# Altium PCB LCLFilter_Compact.PcbDoc
Units mm, origin at the board's own origin, x right, y up, seen from the top; angles counter-clockwise.
Board outline 126 x 101 mm, 2 copper layers (Top Layer, Bottom Layer); 16 components, 12 nets, 31 pads, 0 vias.
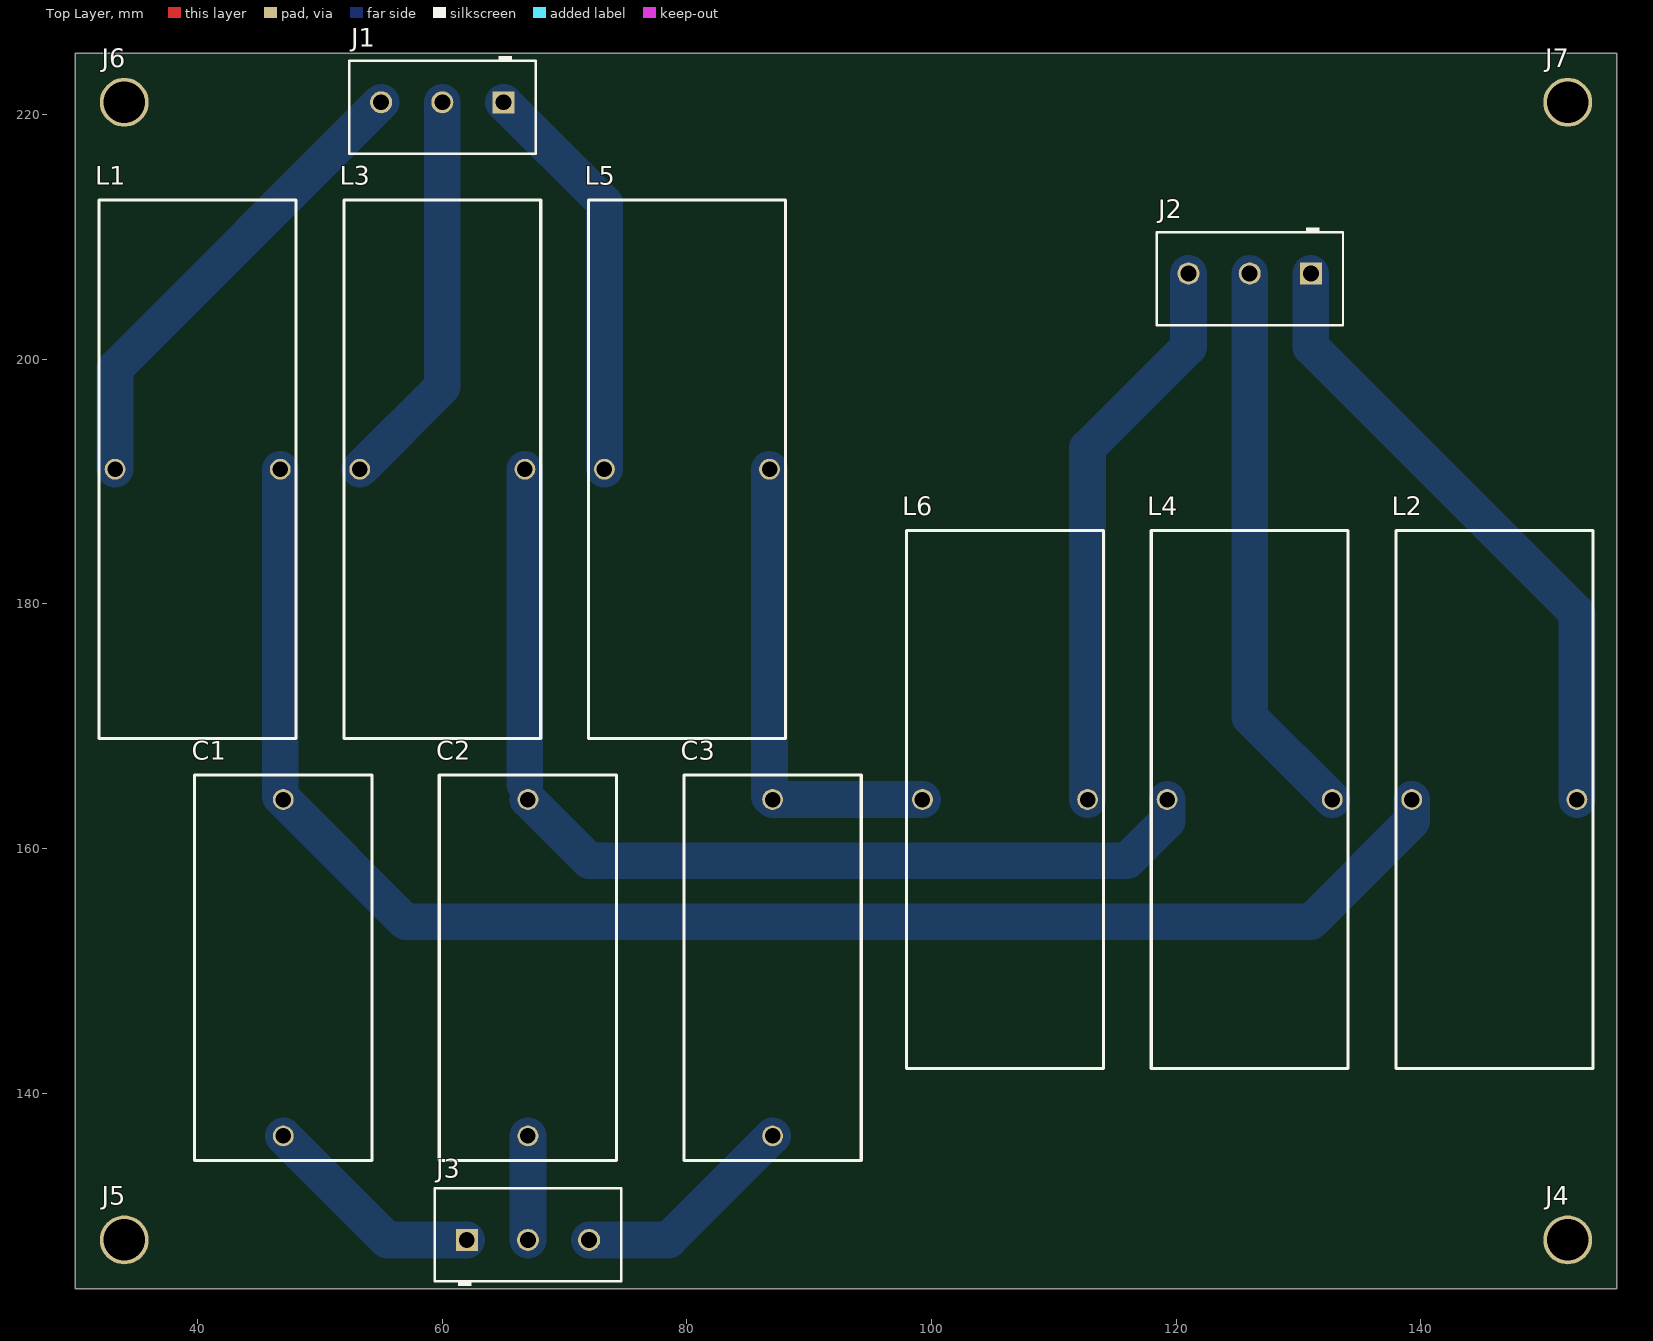
[diagram p0: Top Layer view]
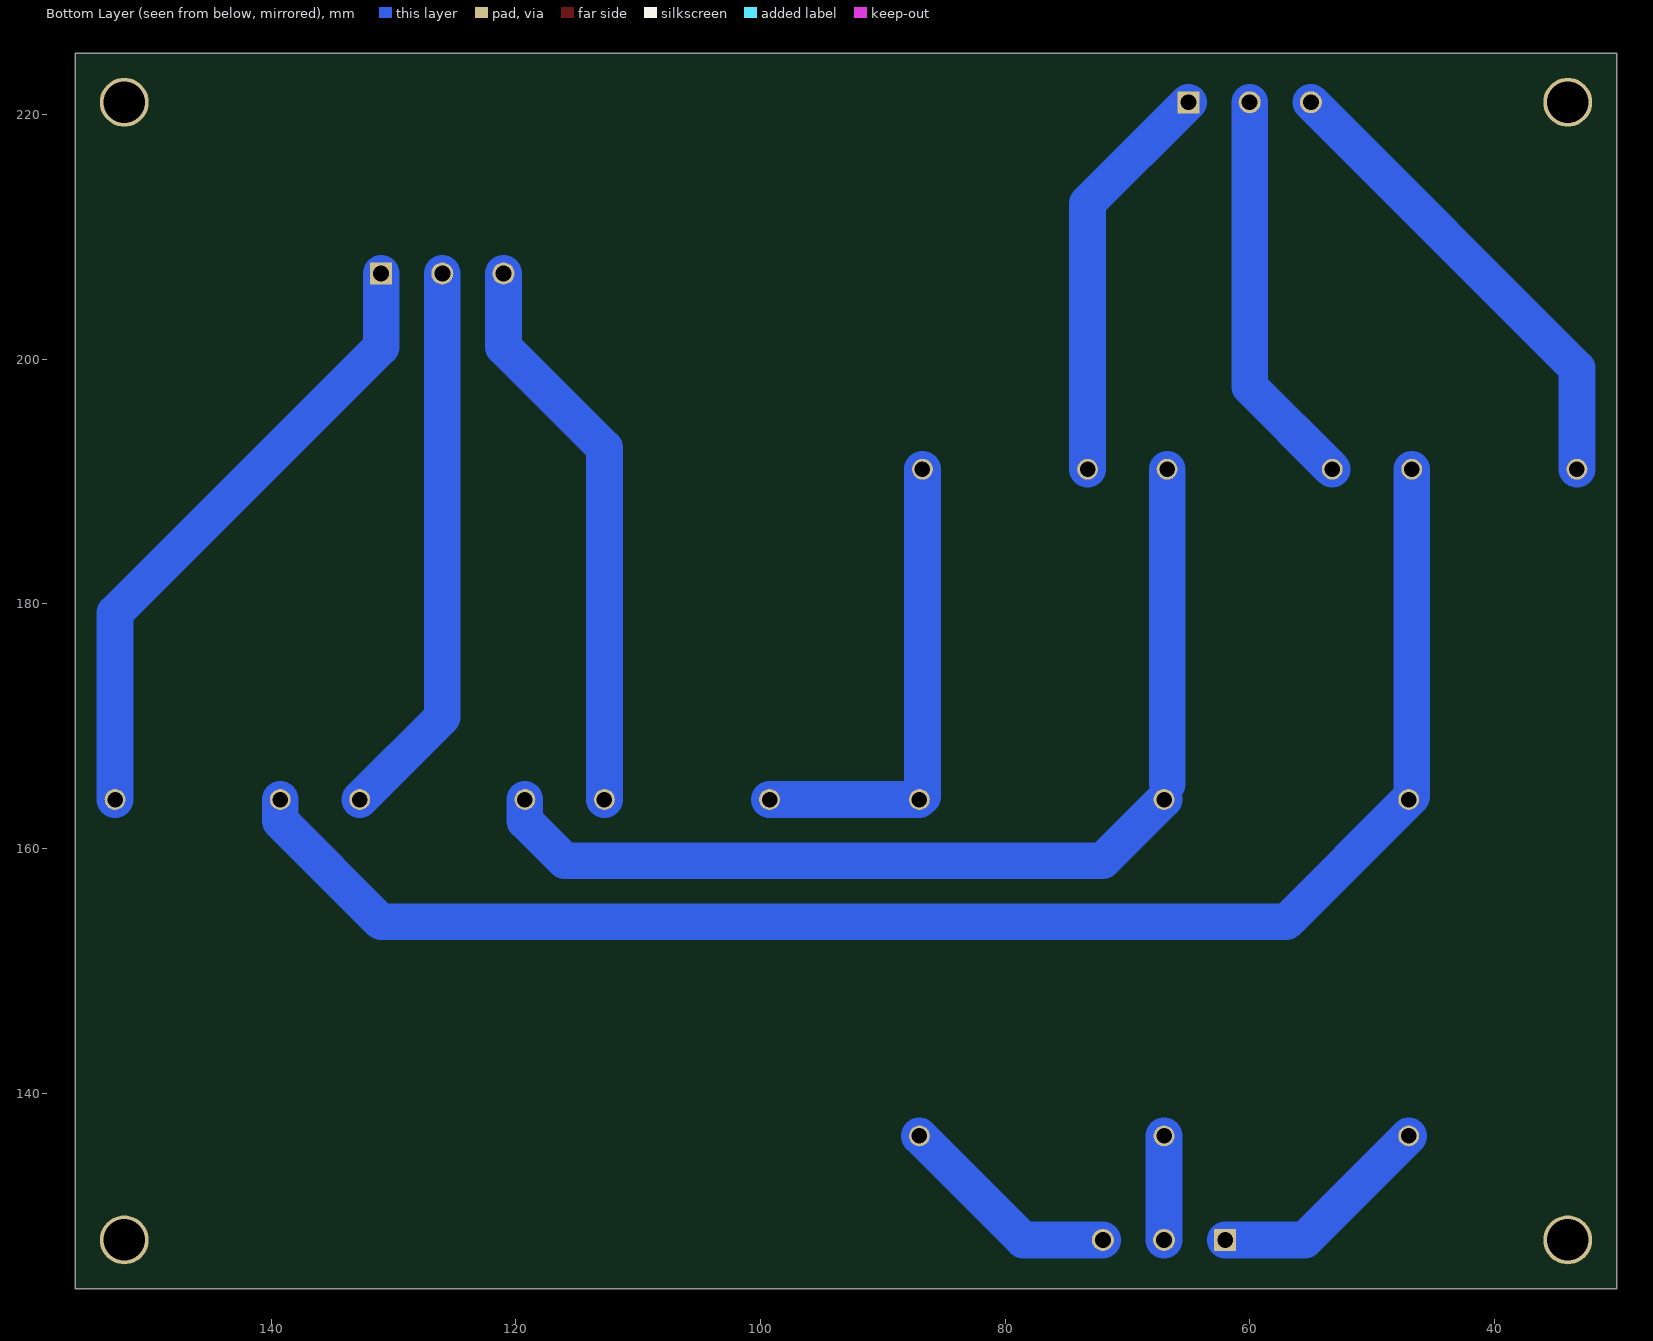
[diagram p1: Bottom Layer view, seen from below]
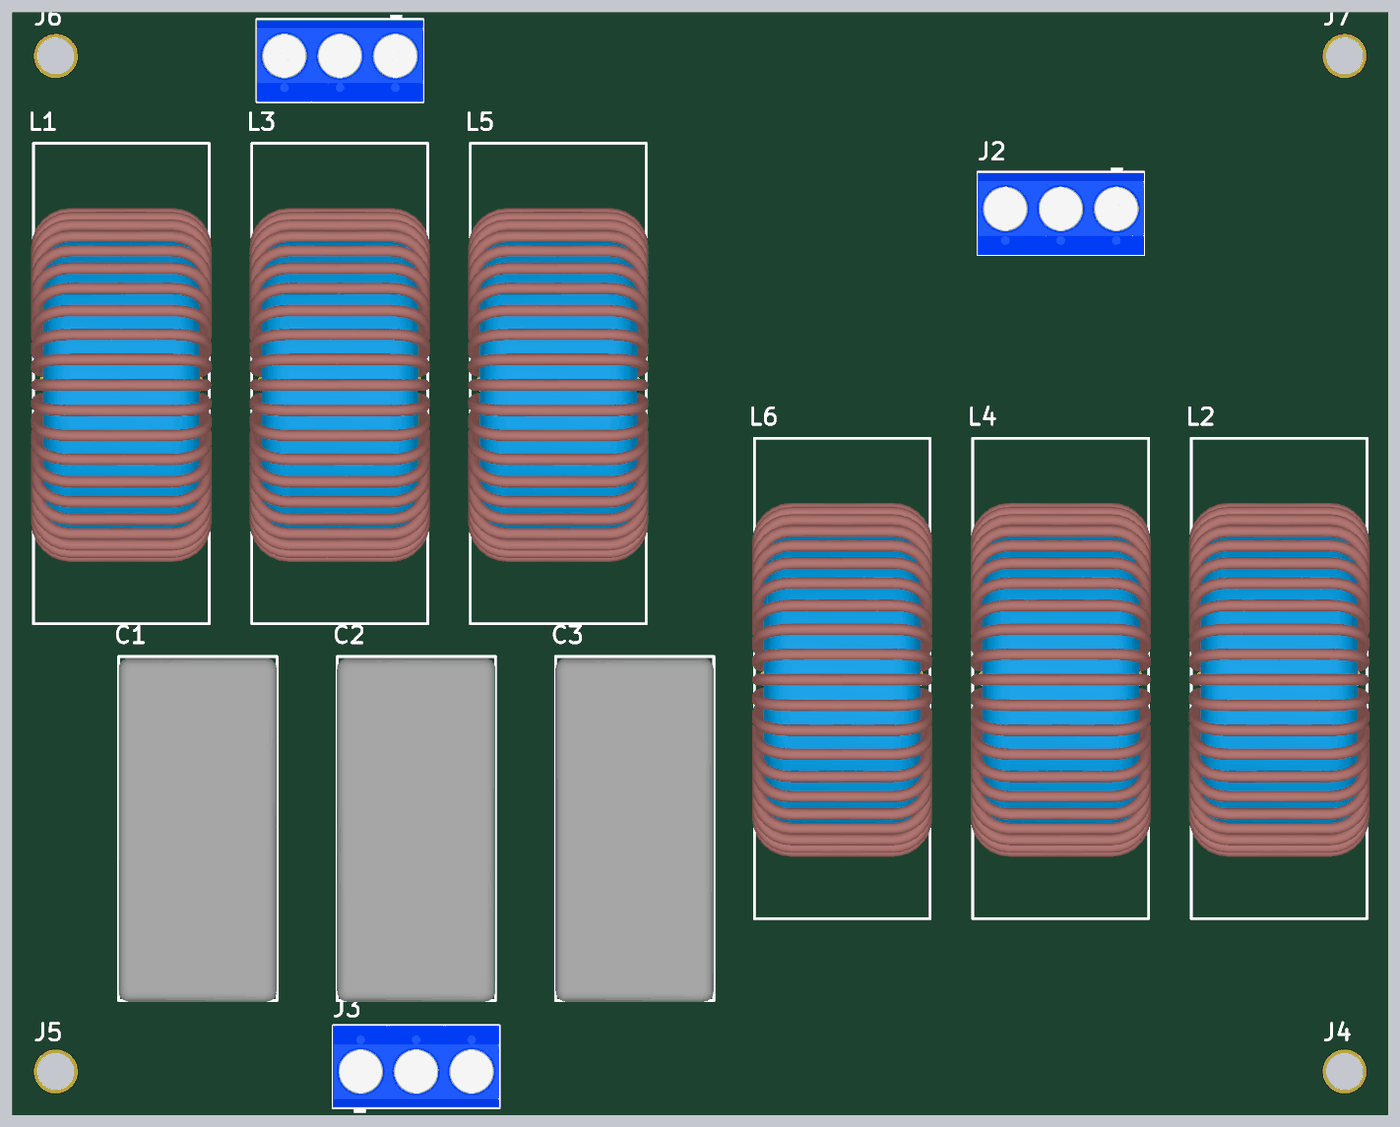
[diagram p2: 3D render of the assembled board from above, using the file's embedded part models]

## Layer stack, top to bottom
Top Solder: solder mask 0.0102, Solder Resist, Dk 3.5
Top Layer: signal copper 0.0356
Dielectric 1: dielectric 0.32, FR-4, Dk 4.8
Bottom Layer: signal copper 0.0356
Bottom Solder: solder mask 0.0102, Solder Resist, Dk 3.5

## Board outline
30,124 156,124 156,225 30,225

## Design rules (kind name [scope] priority, off if disabled: settings)
Clearance [All] p1: gap=0.254 ignorepadtopadclearanceinfootprint=FALSE except(0: Arc-Hole Track-Hole SMDPad-Hole THPad-Hole Via-Hole Fill-Hole Poly-Hole Region-Hole Text-Hole; 2: Arc-Arc Arc-Track Track-Track)
Height [All] p1: minheight=0 maxheight=50 prefheight=12.7
HoleSize [All] p1: absolutevalues=TRUE maxlimit=4 minlimit=0.025 maxpercent=80.000 minpercent=20.000
PolygonConnect [All] p1: connectstyle=Relief reliefconductorwidth=0.254 reliefentries=4 polygonreliefangle="90 Angle" airgapwidth=0.254
RoutingVias [All] p1: holewidth=0.711 width=1.27 viastyle="Through Hole" minholewidth=0.711 minwidth=1.27 maxholewidth=0.711 maxwidth=1.27
SolderMaskExpansion [All] p1: expansion=0.102 istentingtop=FALSE
Width [All] p1: maxlimit=5 minlimit=0.254 preferedwidth=0.254
28 further rules are at their usual default settings.

## Components (designator, comment, footprint, x,y, rotation, side; value= is the part's Value field where it differs from the comment)
C1 "PHE450HF7220JR06L2" "Film Capacitor PHE450HF7220JR06L2" 47,150.25 r180 top
C2 "PHE450HF7220JR06L2" "Film Capacitor PHE450HF7220JR06L2" 67,150.25 r180 top
C3 "PHE450HF7220JR06L2" "Film Capacitor PHE450HF7220JR06L2" 87,150.25 r180 top
J1 "3PinTerminal" "3 Pin Terminal" 60,221 r180 top
J2 "3PinTerminal" "3 Pin Terminal" 126,207 r180 top
J3 "3PinTerminal" "3 Pin Terminal" 67,128 r0 top
J4 "M3 Mounting Hole" "M3 Mounting Hole" 152,128 r0 top
J5 "M3 Mounting Hole" "M3 Mounting Hole" 34,128 r0 top
J6 "M3 Mounting Hole" "M3 Mounting Hole" 34,221 r0 top
J7 "M3 Mounting Hole" "M3 Mounting Hole" 152,221 r0 top
L1 "744156" "Toroid Inductor 744156" 40,191 r0 top
L2 "744156" "Toroid Inductor 744156" 146,164 r0 top
L3 "744156" "Toroid Inductor 744156" 60,191 r0 top
L4 "744156" "Toroid Inductor 744156" 126,164 r0 top
L5 "744156" "Toroid Inductor 744156" 80,191 r0 top
L6 "744156" "Toroid Inductor 744156" 106,164 r0 top

## Footprints (in the part's own frame and the unit in brackets; to place one, negate y for a bottom-side part, rotate by r counter-clockwise, add the part's x,y. Pads: shape width x height; smd on the part's side, far side on the other; paste and mask are expansions set on the pad)
"3 Pin Terminal" [mm] "WURTH ELEKTRONIK 691102710003"
  rect 1.8x1.8 hole 1.3: 1(-5,0)
  round 1.8 hole 1.3: 2(0,0) 3(5,0)
  silkscreen extent -7.63,-3.78 7.61,4.22, body extent -7.63,-3.3 7.61,4.2, height 10
"Film Capacitor PHE450HF7220JR06L2" [mm] "KEMET PHE450 Metallised Polypropylene Film Capacitor, 180 V ac, 250 V dc, ±5%, 2.2µF, Through Hole"
  round 1.7 hole 1.27: 1(0,13.75) 2(0,-13.75)
  silkscreen extent -7.25,-15.75 7.25,15.75, body extent -7.24,-15.62 7.26,15.88, height 24.01
"M3 Mounting Hole" [mm]
  round 4 hole 3.4: 1(0,0)
"Toroid Inductor 744156" [mm] "Toroidal Inductor, WE-SI, 380 µH, 6.2 A, 0.07 ohm, ± 20%"
  round 1.7 hole 1.27: 1(-6.75,0) 2(6.75,0)
  silkscreen extent -8.05,-22 8.05,22, body extent -8.25,-16.34 8.25,16.08, height 34.1

## Part data
C1 C2 C3: "Capacitor", Manufacturer_Name=KEMET, Datasheet Link=https://docs.rs-online.com/a458/0900766b817170df.pdf, Height=24.5mm, Manufacturer_Part_Number=PHE450HF7220JR06L2
J1 J2 J3: "3 Position Terminal Block 5.08mm", Digikey Part Number=ED2610-ND, Manufacturer="On Shore Technology", Package=HDR03, Part Number=OSTTC032162, Temperature="-30°C to +105°C", Temperature Range High=+105°C, Temperature Range Low=-30°C, Voltage=300V, ComponentLink1Description=Upverter, ComponentLink1URL=https://upverter.com/upn/revision/2b80058b23306b34/, ComponentLink2Description=Datasheet, ComponentLink2URL=https://upverter.com/datasheet/d9a5d2e095ec14efdc364e45047c257fc4ca76eb.pdf, Digikey Description="CONN TERM BLOCK 5.08MM VERT 3POS PCB", helpURL=https://upverter.com/upn/revision/2b80058b23306b34/, Is Female=yes, Lead Free=yes, Price=0.382016875697, RoHS=TRUE, Supplier 1=Digi-Key, Supplier 2=Mouser, Supplier Part Number 1=ED2610-ND
L1 L2 L3 L4 L5 L6: "Toroidal Inductor, WE-SI, 380 µH, 6.2 A, 0.07 ohm, ± 20%", Manufacturer_Name="Wurth Elektronik", Manufacturer_Part_Number=744156

## Nets (pads, with @x,y where several pads share a name; then routed paths per layer and width w, separated by ;. In a path a pad name is that pad's centre, name@x,y a point inside that pad or via, vN(x,y) a via of type N, cw(c..) or ccw(c..) an arc to the next point about the centre after c; other vN are vias at no path point)
Damp1: C1.1 J3.1 | length 18.5
  Bottom Layer w3: C1.1 55.5,128 J3.1
Damp2: C2.1 J3.2 | length 8.5
  Bottom Layer w3: J3.2 C2.1
Damp3: C3.1 J3.3 | length 18.5
  Bottom Layer w3: J3.3 78.5,128 C3.1
NetC1_2: C1.2 L1.2 L2.1 | length 128.7
  Bottom Layer w3: L1.2 46.75,164.25 C1.2 57,154 131,154 139.25,162.25 L2.1
NetC2_2: C2.2 L3.2 L4.1 | length 83.2
  Bottom Layer w3: 66.75,165.25 L3.2 ; C2.2 72,159 116,159 119.25,162.25 L4.1
NetC3_2: C3.2 L5.2 L6.1 | length 39.4
  Bottom Layer w3: L5.2 86.75,164.25 C3.2 L6.1
NetJ1_1: J1.1 L5.1 | length 33.4
  Bottom Layer w3: J1.1 73.25,212.75 L5.1
NetJ1_2: J1.2 L3.1 | length 32.8
  Bottom Layer w3: L3.1 60,197.75 J1.2
NetJ1_3: J1.3 L1.1 | length 39
  Bottom Layer w3: L1.1 33.25,199.25 J1.3
NetJ2_1: J2.1 L2.2 | length 52
  Bottom Layer w3: J2.1 131,201 152.75,179.25 L2.2
NetJ2_2: J2.2 L4.2 | length 45.8
  Bottom Layer w3: J2.2 126,170.75 L4.2
NetJ2_3: J2.3 L6.2 | length 46.4
  Bottom Layer w3: L6.2 112.75,192.75 121,201 J2.3
pads on no net: J4.1 J5.1 J6.1 J7.1